# Altium PCB Cross-board_V2.PcbDoc
Units mm, origin at the board's own origin, x right, y up, seen from the top; angles counter-clockwise.
Board outline 140 x 180 mm, 2 copper layers (Top Layer, Bottom Layer); 164 components, 168 nets, 527 pads, 0 vias.
Unrouted connection lines stored in the file: 332.
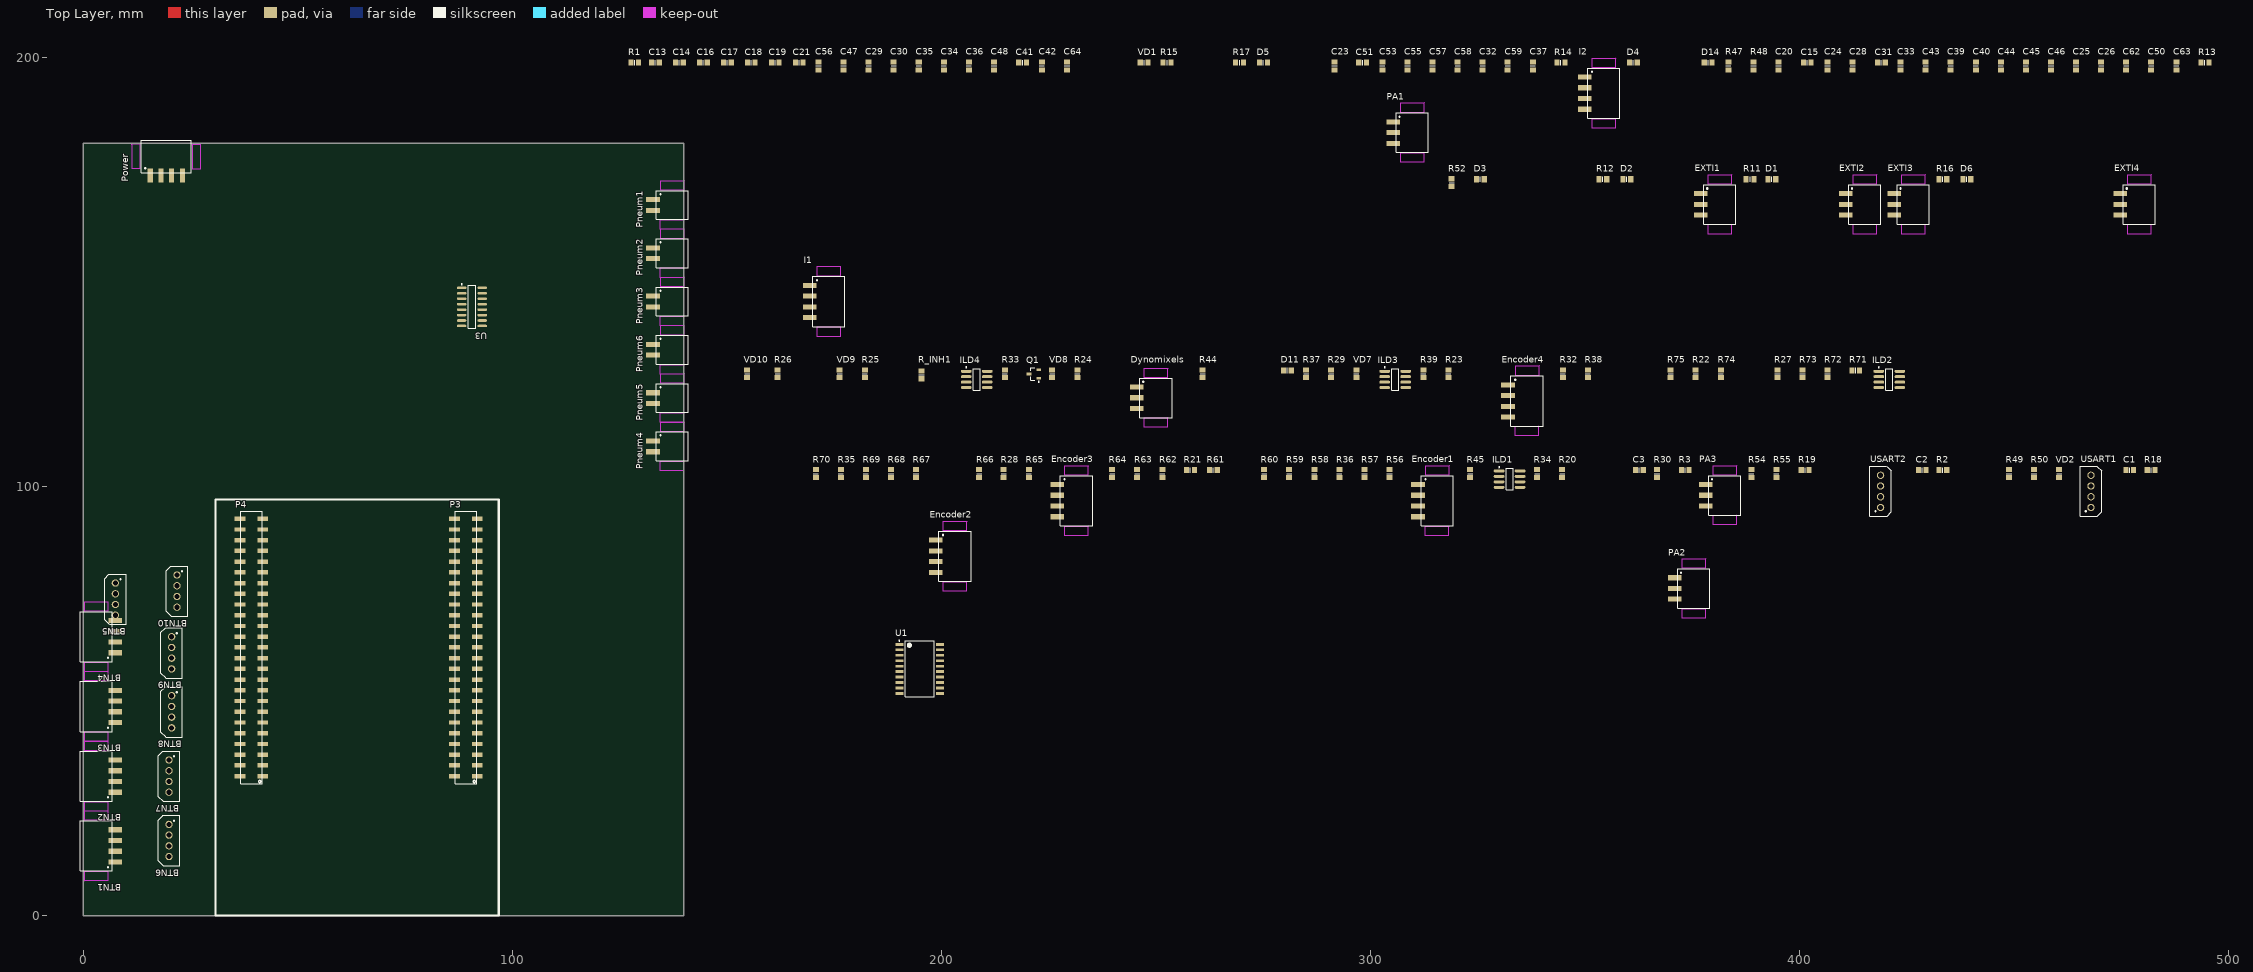
[diagram p0: Top Layer view]
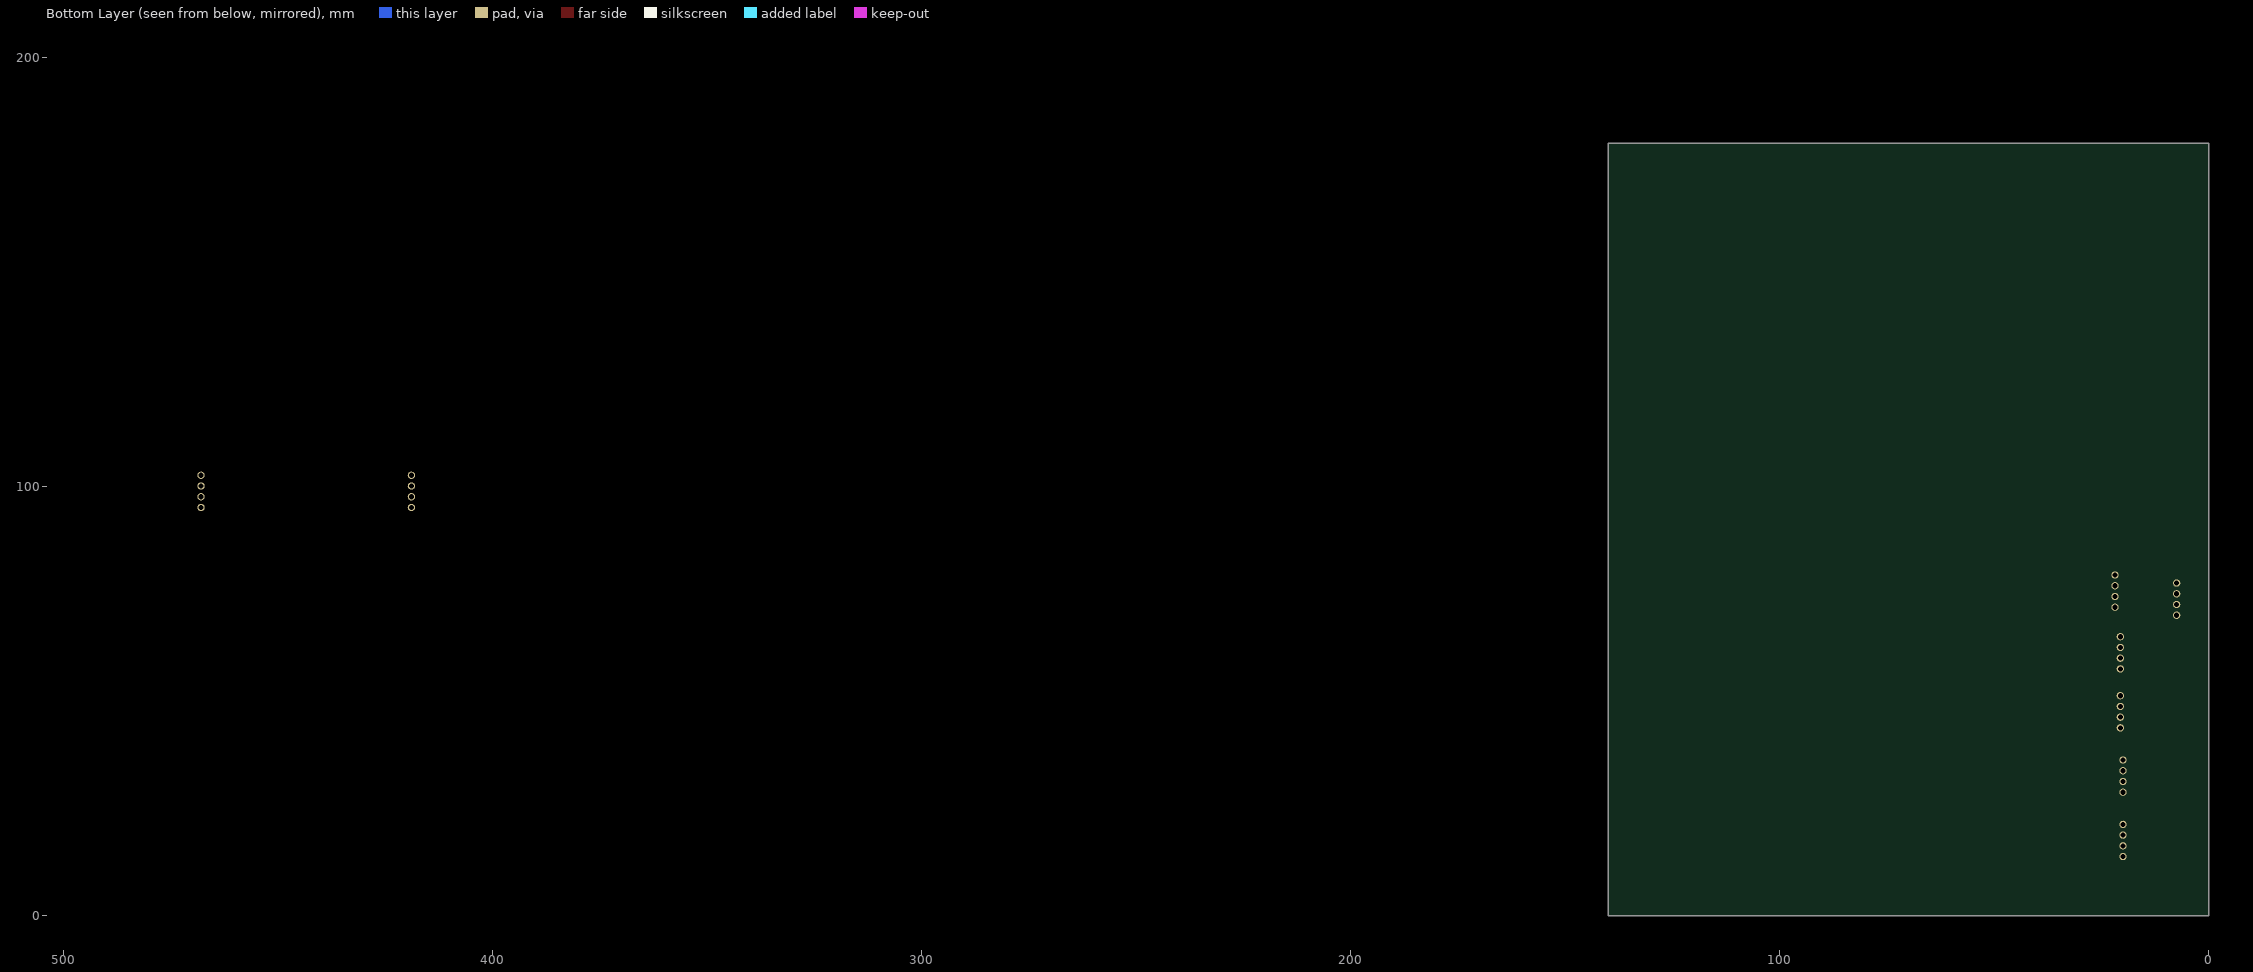
[diagram p1: Bottom Layer view, seen from below]

## Layer stack, top to bottom
Top Solder: solder mask 0.0102, Solder Resist, Dk 3.5
Top Layer: signal copper 0.0356
Dielectric 1: dielectric 0.32, FR-4, Dk 4.8
Bottom Layer: signal copper 0.0356
Bottom Solder: solder mask 0.0102, Solder Resist, Dk 3.5

## Board outline
0,0 140,0 140,180 0,180

## Design rules (kind name [scope] priority, off if disabled: settings)
Clearance [All] p1: gap=0.254
ComponentClearance [All] p1 off: gap=0.254 collisioncheckmode=3 verticalgap=0.254 showdistances=FALSE
PolygonConnect [All] p1: connectstyle=Relief reliefconductorwidth=0.254 reliefentries=4 polygonreliefangle="90 Angle" airgapwidth=0.254
RoutingVias [All] p1: holewidth=0.711 width=1.27 viastyle="Through Hole" minholewidth=0.711 minwidth=1.27 maxholewidth=0.711 maxwidth=1.27
SolderMaskExpansion [All] p1: expansion=0.102
Width [All] p1: maxlimit=0.254 minlimit=0.254 preferedwidth=0.254
29 further rules are at their usual default settings.

## Components (designator, comment, footprint, x,y, rotation, side; value= is the part's Value field where it differs from the comment)
BTN1 "Header3.5mmX4way" "CAT5 2.5x4_smd" 7.5,12.5 r270 top
BTN2 "Header3.5mmX4way" "CAT5 2.5x4_smd" 7.5,28.75 r270 top
BTN3 "Header3.5mmX4way" "CAT5 2.5x4_smd" 7.5,45 r270 top
BTN4 "Header3.5mmX4way" "CAT5 2.5x4_smd" 7.5,61.25 r270 top
BTN5 "Header3.5mmX4way" "CAT5 2.5x4_THR" 7.5,77.5 r270 top
BTN6 "Header3.5mmX4way" "CAT5 2.5x4_THR" 20,21.25 r270 top
BTN7 "Header3.5mmX4way" "CAT5 2.5x4_THR" 20,36.25 r270 top
BTN8 "Header3.5mmX4way" "CAT5 2.5x4_THR" 20.625,51.25 r270 top
BTN9 "Header3.5mmX4way" "CAT5 2.5x4_THR" 20.625,65 r270 top
BTN10 "Header3.5mmX4way" "CAT5 2.5x4_THR" 21.875,79.375 r270 top
C1 "Cap" 6-0805_N 477.901,103.759 r0 top
C2 "Cap" 6-0805_N 429.514,103.759 r0 top
C3 "Cap" 6-0805_N 363.601,103.759 r0 top
C13 "Cap" 6-0805_N 134.239,198.755 r0 top
C14 "Cap" 6-0805_N 139.827,198.755 r0 top
C15 "Cap" 6-0805_n 402.717,198.755 r0 top
C16 "Cap" 6-0805_N 145.415,198.755 r0 top
C17 "Cap" 6-0805_N 151.003,198.755 r0 top
C18 "Cap" 6-0805_N 156.591,198.755 r0 top
C19 "Cap" 6-0805_N 162.179,198.755 r0 top
C20 "Cap" 6-0805_n 395.224,198.882 r90 top
C21 "Cap" 6-0805_n 167.767,198.755 r0 top
C23 "Cap" 6-0805_n 291.719,198.882 r90 top
C24 "Cap" 6-0805_n 406.654,198.882 r90 top
C25 "Cap" 6-0805_n 464.566,198.882 r90 top
C26 "Cap" 6-0805_n 470.408,198.882 r90 top
C28 "Cap" 6-0805_n 412.496,198.882 r90 top
C29 "Cap" 6-0805_N 183.134,198.882 r90 top
C30 "Cap" 6-0805_n 188.976,198.882 r90 top
C31 "Cap" 6-0805_n 419.989,198.755 r0 top
C32 "Cap" 6-0805_N 326.263,198.882 r90 top
C33 "Cap" 6-0805_n 423.672,198.882 r90 top
C34 "Cap" 6-0805_n 200.66,198.882 r90 top
C35 "Cap" 6-0805_n 194.818,198.882 r90 top
C36 "Cap" 6-0805_N 206.502,198.882 r90 top
C37 "Cap" 6-0805_n 337.947,198.882 r90 top
C39 "Cap" 6-0805_n 435.356,198.882 r90 top
C40 "Cap" 6-0805_n 441.198,198.882 r90 top
C41 "Cap" 6-0805_N 219.837,198.755 r0 top
C42 "Cap" 6-0805_N 223.52,198.882 r90 top
C43 "Cap" 6-0805_n 429.514,198.882 r90 top
C44 "Cap" 6-0805_n 447.04,198.882 r90 top
C45 "Cap" 6-0805_n 452.882,198.882 r90 top
C46 "Cap" 6-0805_n 458.724,198.882 r90 top
C47 "Cap" 6-0805_n 177.292,198.882 r90 top
C48 "Cap" 6-0805_N 212.344,198.882 r90 top
C50 "Cap" 6-0805_N 482.092,198.882 r90 top
C51 "Cap" 6-0805_n 299.085,198.755 r0 top
C53 "Cap" 6-0805_n 302.895,198.882 r90 top
C55 "Cap" 6-0805_n 308.737,198.882 r90 top
C56 "Cap" 6-0805_n 171.45,198.882 r90 top
C57 "Cap" 6-0805_n 314.579,198.882 r90 top
C58 "Cap" 6-0805_n 320.421,198.882 r90 top
C59 "Cap" 6-0805_n 332.105,198.882 r90 top
C62 "Cap" 6-0805_N 476.25,198.882 r90 top
C63 "Cap" 6-0805_N 487.934,198.882 r90 top
C64 "Cap" 6-0805_N 229.362,198.882 r90 top
D1 "SMD LED" 6-0805_N 394.462,171.577 r0 top
D2 "SMD LED" 6-0805_N 360.68,171.577 r0 top
D3 "SMD LED" 6-0805_N 326.517,171.577 r0 top
D4 "SMD LED" 6-0805_N 362.204,198.755 r0 top
D5 "SMD LED" 6-0805_N 275.971,198.755 r0 top
D6 "SMD LED" 6-0805_N 439.928,171.577 r0 top
D11 "LED0" 6-0805_N 281.559,127 r0 top
D14 "LED0" 6-0805_N 379.603,198.755 r0 top
Dynomixels "Header 3" "CAT5 2.5x3SMD" 246.507,123.19 r90 top
Encoder1 "Header3.5mmX4way" "CAT5 2.5x4_smd" 311.15,100.457 r90 top
Encoder2 "Header3.5mmX4way" "CAT5 2.5x4_smd" 198.75,87.5 r90 top
Encoder3 "Header3.5mmX4way" "CAT5 2.5x4_smd" 227.076,100.457 r90 top
Encoder4 "Header3.5mmX4way" "CAT5 2.5x4_smd" 332.105,123.698 r90 top
EXTI1 "Header 3" "CAT5 2.5x3SMD" 377.952,168.275 r90 top
EXTI2 "Header 3" "CAT5 2.5x3SMD" 411.734,168.275 r90 top
EXTI3 "Header 3" "CAT5 2.5x3SMD" 423.037,168.275 r90 top
EXTI4 "Header 3" "CAT5 2.5x3SMD" 475.742,168.275 r90 top
I1 "Header 4" "CAT5 2.5x4_smd" 169.375,146.875 r90 top
I2 "Header 4" "CAT5 2.5x4_smd" 350.012,195.453 r90 top
ILD1 "ILD207" SO8_M 332.486,101.727 r0 top
ILD2 "ILD207" SO8_M 421.005,124.968 r0 top
ILD3 "ILD207" SO8_M 305.816,124.968 r0 top
ILD4 "ILD207" SO8_M 208.28,124.968 r0 top
P3 "Header 25X2" "25x2pin connector smd - duplicate" 91.875,32.5 r90 top
P4 "Header 25X2" "25x2pin connector smd - duplicate" 41.875,32.5 r90 top
PA1 "Аналоговый вход 1" "CAT5 2.5x3SMD" 306.25,185 r90 top
PA2 "Аналоговый вход 2" "CAT5 2.5x3SMD" 371.875,78.75 r90 top
PA3 "Аналоговый вход 3" "CAT5 2.5x3SMD" 379.095,100.457 r90 top
Pneum1 "Header_vetrical_3.5x2" "cat5 2.5x 2p SMD" 133.75,166.875 r90 top
Pneum2 "Header_vetrical_3.5x2" "cat5 2.5x 2p SMD" 133.75,155.625 r90 top
Pneum3 "Header_vetrical_3.5x2" "cat5 2.5x 2p SMD" 133.75,144.375 r90 top
Pneum4 "Header_vetrical_3.5x2" "cat5 2.5x 2p SMD" 133.75,110.625 r90 top
Pneum5 "Header_vetrical_3.5x2" "cat5 2.5x 2p SMD" 133.75,121.875 r90 top
Pneum6 "Header_vetrical_3.5x2" "cat5 2.5x 2p SMD" 133.75,133.125 r90 top
Power "Header3.5mmX4way" "CAT5 2.5x4_smd" 15.625,172.5 r180 top
Q1 "IRLML5103" SOT-23_N 221.615,126.238 r0 top
R1 "Res3" 6-0805_N 129.413,198.755 r0 top
R2 "Res3" 6-0805_N 434.34,103.759 r0 top
R3 "Res3" 6-0805_N 374.269,103.759 r0 top
R11 "Res2" 6-0805_N 389.382,171.577 r0 top
R12 "Res2" 6-0805_N 355.092,171.577 r0 top
R13 "Res2" 6-0805_N 495.427,198.755 r0 top
R14 "Res2" 6-0805_N 345.313,198.755 r0 top
R15 "Res2" 6-0805_N 253.492,198.755 r0 top
R16 "Res2" 6-0805_N 434.34,171.577 r0 top
R17 "Res2" 6-0805_N 270.383,198.755 r0 top
R18 "Res2" 6-0805_N 482.854,103.759 r0 top
R19 "Res2" 6-0805_N 402.209,103.759 r0 top
R20 "Res2" 6-0805_N 344.805,103.886 r90 top
R21 "Res2" 6-0805_N 258.953,103.759 r0 top
R22 "Res2" 6-0805_N 375.92,127.127 r90 top
R23 "Res2" 6-0805_N 318.262,127.127 r90 top
R24 "Res2" 6-0805_N 231.775,127.127 r90 top
R25 "Res2" 6-0805_N 182.245,127.127 r90 top
R26 "Res2" 6-0805_N 161.925,127.127 r90 top
R27 "Res2" 6-0805_N 394.97,127.127 r90 top
R28 "Res2" 6-0805_N 214.63,103.886 r90 top
R29 "Res3" 6-0805_N 290.957,127.127 r90 top
R30 "Res3" 6-0805_N 366.903,103.886 r90 top
R32 "Res3" 6-0805_N 344.932,127.127 r90 top
R33 "Res3" 6-0805_N 214.884,127.127 r90 top
R34 "Res3" 6-0805_N 338.963,103.886 r90 top
R35 "Res3" 6-0805_N 176.657,103.886 r90 top
R36 "Res3" 6-0805_N 292.862,103.886 r90 top
R37 "Res3" 6-0805_N 285.115,127.127 r90 top
R38 "Res3" 6-0805_N 350.774,127.127 r90 top
R39 "Res3" 6-0805_N 312.42,127.127 r90 top
R44 "Res2" 6-0805_N 260.985,127.127 r90 top
R45 "Res2" 6-0805_N 323.342,103.886 r90 top
R47 "Res3" 6-0805_N 383.54,198.882 r90 top
R48 "Res3" 6-0805_N 389.382,198.882 r90 top
R49 "Res2" 6-0805_N 448.945,103.886 r90 top
R50 "Res2" 6-0805_N 454.787,103.886 r90 top
R52 "Res2" 6-0805_N 319.024,171.704 r90 top
R54 "Res2" 6-0805_N 388.874,103.886 r90 top
R55 "Res2" 6-0805_N 394.716,103.886 r90 top
R56 "Res2" 6-0805_N 304.546,103.886 r90 top
R57 "Res2" 6-0805_N 298.704,103.886 r90 top
R58 "Res2" 6-0805_N 287.02,103.886 r90 top
R59 "Res2" 6-0805_N 281.178,103.886 r90 top
R60 "Res2" 6-0805_N 275.336,103.886 r90 top
R61 "Res2" 6-0805_N 264.287,103.759 r0 top
R62 "Res2" 6-0805_N 251.587,103.886 r90 top
R63 "Res2" 6-0805_N 245.745,103.886 r90 top
R64 "Res2" 6-0805_N 239.903,103.886 r90 top
R65 "Res2" 6-0805_N 220.472,103.886 r90 top
R66 "Res2" 6-0805_N 208.915,103.886 r90 top
R67 "Res2" 6-0805_N 194.183,103.886 r90 top
R68 "Res2" 6-0805_N 188.341,103.886 r90 top
R69 "Res2" 6-0805_N 182.499,103.886 r90 top
R70 "Res2" 6-0805_N 170.815,103.886 r90 top
R71 "Res2" 6-0805_N 414.02,127 r0 top
R72 "Res2" 6-0805_N 406.654,127.127 r90 top
R73 "Res2" 6-0805_N 400.812,127.127 r90 top
R74 "Res2" 6-0805_N 381.762,127.127 r90 top
R75 "Res2" 6-0805_N 370.078,127.127 r90 top
R_INH1 "Res3" 6-0805_N 195.453,126.873 r90 top
U1 "SN74241" "SOIC127 (sn74241)" 195,57.5 r0 top
U3 "ULN2003D" SO16_N 90.625,141.875 r180 top
USART1 "Header 4" "CAT5 2.5x4_THR" 467.995,95.123 r90 top
USART2 "Header 4" "CAT5 2.5x4_THR" 418.973,95.123 r90 top
VD1 "Bipolar LED" 6-0805_N 248.158,198.755 r0 top
VD2 "Bipolar LED" 6-0805_N 460.629,103.886 r90 top
VD7 "Bipolar LED" 6-0805_N 296.799,127.127 r90 top
VD8 "Bipolar LED" 6-0805_N 225.933,127.127 r90 top
VD9 "Bipolar LED" 6-0805_N 176.403,127.127 r90 top
VD10 "Bipolar LED" 6-0805_N 154.813,127.127 r90 top

## Footprints (in the part's own frame and the unit in brackets; to place one, negate y for a bottom-side part, rotate by r counter-clockwise, add the part's x,y. Pads: shape width x height; smd on the part's side, far side on the other; paste and mask are expansions set on the pad)
6-0805_N [mm]
  rect 1.2x1.4 smd: 1(0.05,0.05) 2(-1.75,0.05)
  silkscreen extent -0.85,-0.55 -0.85,0.65
6-0805_n [mm]
  rect 1.2x1.4 smd: 1(0.05,0.05) 2(-1.75,0.05)
  silkscreen extent -0.85,-0.55 -0.85,0.65
"25x2pin connector smd - duplicate" [mm]
  rect 1.02x2.5 smd: 1(0,0) 2(0,5.3) 3(2.5,0) 4(2.5,5.3) 5(5,0) 6(5,5.3) 7(7.5,0) 8(7.5,5.3) 9(10,0) 10(10,5.3) 11(12.5,0) 12(12.5,5.3) 13(15,0) 14(15,5.3) 15(17.5,0) 16(17.5,5.3) 17(20,0) 18(20,5.3) 19(22.5,0) 20(22.5,5.3) 21(25,0) 22(25,5.3) 23(27.5,0) 24(27.5,5.3) 25(30,0) 26(30,5.3) 27(32.5,0) 28(32.5,5.3) 29(35,0) 30(35,5.3) 31(37.5,0) 32(37.5,5.3) 33(40,0) 34(40,5.3) 35(42.5,0) 36(42.5,5.3) 37(45,0) 38(45,5.3) 39(47.5,0) 40(47.5,5.3) 41(50,0) 42(50,5.3) 43(52.5,0) 44(52.5,5.3) 45(55,0) 46(55,5.3) 47(57.5,0) 48(57.5,5.3) 49(60,0) 50(60,5.3)
  silkscreen extent -1.75,0.15 61.75,5.15
"CAT5 2.5x3SMD" [mm] "3pads"
  rect 1.2x3.2 smd: 1(0,0.9) 2(-2.5,0.9) 3(-5,0.9)
  Top Layer keep-out region: 2.3,-6.35 4.4,-6.35 4.3,-6.25 4.3,-0.75 2.3,-0.75
  Top Layer keep-out region: -9.3,-6.3 -7.2,-6.3 -7.3,-6.2 -7.3,-0.7 -9.3,-0.7
  silkscreen extent -7.1,-7.3 2.1,0.2
"CAT5 2.5x4_smd" [mm] "4pad"
  rect 1.2x3.2 smd: 1(0,0) 2(-2.5,0) 3(-5,0) 4(-7.5,0)
  Top Layer keep-out region: -11.8,-7.2 -9.7,-7.2 -9.8,-7.1 -9.8,-1.6 -11.8,-1.6
  Top Layer keep-out region: 2.3,-7.25 4.4,-7.25 4.3,-7.15 4.3,-1.65 2.3,-1.65
  silkscreen extent -9.6,-8.2 2.1,-0.7
"CAT5 2.5x4_THR" [mm] "4 pins"
  round 1.7 hole 1.2: 1(0,0) 2(2.5,0) 3(5,0) 4(7.5,0)
  silkscreen extent -2.1,-2.5 9.65,2.5
"cat5 2.5x 2p SMD" [mm] "2pads"
  rect 1.2x3.2 smd: 1(0,0.9) 2(-2.5,0.9)
  Top Layer keep-out region: 2.3,-6.35 4.4,-6.35 4.3,-6.25 4.3,-0.75 2.3,-0.75
  Top Layer keep-out region: -6.8,-6.3 -4.7,-6.3 -4.8,-6.2 -4.8,-0.7 -6.8,-0.7
  silkscreen extent -4.6,-7.3 2.1,0.2
SO8_M [mm] "SOIC, 8-Leads, Body 4.9x3.9mm, Pitch 1.27mm, IPC Low Density"
  oval 2.5x0.7 smd: 1(-2.45,1.905) 2(-2.45,0.635) 3(-2.45,-0.635) 4(-2.45,-1.905) 5(2.45,-1.905) 6(2.45,-0.635) 7(2.45,0.635) 8(2.45,1.905)
  silkscreen extent -2.57,-2.5 0.8,2.93, body extent -2,-2.5 2,2.5, height 1.75
SO16_N [mm] "16-Pin Small Outline Integrated Circuit 1.27 mm Pitch, IPC Medium Density"
  oval 2.2x0.6 smd: 1(2.4,-4.445) 2(2.4,-3.175) 3(2.4,-1.905) 4(2.4,-0.635) 5(2.4,0.635) 6(2.4,1.905) 7(2.4,3.175) 8(2.4,4.445) 9(-2.4,4.445) 10(-2.4,3.175) 11(-2.4,1.905) 12(-2.4,0.635) 13(-2.4,-0.635) 14(-2.4,-1.905) 15(-2.4,-3.175) 16(-2.4,-4.445)
  silkscreen extent -0.9,-5.42 2.52,5, body extent -1.95,-4.95 1.95,4.95, height 1.75
"SOIC127 (sn74241)" [mm] "SOIC, 20-Leads, Body 12,80x7,50mm, Pitch 1,27mm, IPC Medium Density"
  rect 1.9x0.65 smd: 1(-4.75,5.715) 2(-4.75,4.445) 3(-4.75,3.175) 4(-4.75,1.905) 5(-4.75,0.635) 6(-4.75,-0.635) 7(-4.75,-1.905) 8(-4.75,-3.175) 9(-4.75,-4.445) 10(-4.75,-5.715) 11(4.75,-5.715) 12(4.75,-4.445) 13(4.75,-3.175) 14(4.75,-1.905) 15(4.75,-0.635) 16(4.75,0.635) 17(4.75,1.905) 18(4.75,3.175) 19(4.75,4.445) 20(4.75,5.715)
  silkscreen extent -4.87,-6.5 3.4,6.71, body extent -3.8,-6.5 3.8,6.5, height 2.65
SOT-23_N [mm] "SOT23, 3-Leads, Body 2.9x1.3mm, Pitch 0.95mm, Lead Span 2.3mm, IPC Medium Density"
  rect 1.15x0.6 smd: 1(1.125,-0.95) 2(1.125,0.95) 3(-1.125,0)
  silkscreen extent -0.7,-1.92 1.25,1.5, body extent -0.7,-1.5 0.7,1.5, height 1.11

## Part data
BTN1 BTN2 BTN3 BTN4 BTN5 BTN6 BTN7 BTN8 BTN9 BTN10 Encoder1 Encoder2 Encoder3 Encoder4 Pneum1 Pneum2 Pneum3 Pneum4 Pneum5 Pneum6 Power: "screw_connector"
C1 C2 C3 C13 C14 C15 C16 C17 C18 C19 C20 C21 C23 C24 C25 C26 C28 C29 C30 C31 C32 C33 C34 C35 C36 C37 C39 C40 C41 C42 C43 C44 C45 C46 C47 C48 C50 C51 C53 C55 C56 C57 C58 C59 C62 C63 C64: "Capacitor"
D1 D2 D3 D4 D5 D6: library part LED0, "Typical INFRARED GaAs LED"
D11 D14: "Typical INFRARED GaAs LED"
Dynomixels EXTI1 EXTI2 EXTI3 EXTI4: "Header, 3-Pin"
I1 I2 USART1 USART2: "Header, 4-Pin"
P3 P4: "Header, 25-Pin, Dual row"
PA1 PA2 PA3: library part "Header 3", "Header, 3-Pin"
Q1: "HEXFET Power MOSFET"
R1 R2 R3 R11 R12 R13 R14 R15 R16 R17 R18 R19 R20 R21 R22 R23 R24 R25 R26 R27 R28 R29 R30 R32 R33 R34 R35 R36 R37 R38 R39 R44 R45 R47 R48 R49 R50 R52 R54 R55 R56 R57 R58 R59 R60 R61 R62 R63 R64 R65 R66 R67 R68 R69 R70 R71 R72 R73 R74 R75 R_INH1: "Resistor"
U3: "Seven Darlington Array"

## Nets (pads, with @x,y where several pads share a name; then routed paths per layer and width w, separated by ;. In a path a pad name is that pad's centre, name@x,y a point inside that pad or via, vN(x,y) a via of type N, cw(c..) or ccw(c..) an arc to the next point about the centre after c; other vN are vias at no path point)
+3.3V: C13.2 C14.2 C16.2 C17.2 C18.2 C19.2 C21.2 C29.2 C30.2 C34.2 C35.2 C36.2 C41.2 C42.2 C47.2 C48.2 C56.2 C64.2 Encoder1.4 Encoder2.4 Encoder3.4 Encoder4.4 EXTI1.3 EXTI2.3 EXTI3.3 EXTI4.3 I1.4 I2.4 Power.2 R47.1 R48.1
+5V: C15.2 C20.2 C24.2 C25.2 C26.2 C28.2 C31.2 C33.2 C39.2 C40.2 C43.2 C44.2 C45.2 C46.2 C50.2 C62.2 C63.2 ILD1.6 ILD1.8 ILD2.6 ILD2.8 ILD3.6 ILD3.8 ILD4.8 PA1.3 PA2.3 PA3.3 Power.3 Q1.2 U1.20
+5V_BOARD: P4.3 P4.4 R52.1
+12V: C23.2 C32.2 C37.2 C51.2 C53.2 C55.2 C57.2 C58.2 C59.2 Dynomixels.2 Pneum1.1 Pneum2.1 Pneum3.1 Pneum4.1 Pneum5.1 Pneum6.1 Power.4 R11.1 R12.1 R13.1 R14.1 R15.1 R16.1 R49.2 R50.2 U3.9 USART1.4
GND: BTN1.1 BTN2.1 BTN3.1 BTN4.1 BTN5.1 BTN6.1 BTN7.1 BTN8.1 BTN9.1 BTN10.1 C1.2 C2.2 C3.2 C13.1 C14.1 C15.1 C16.1 C17.1 C18.1 C19.1 C20.1 C21.1 C23.1 C24.1 C25.1 C26.1 C28.1 C29.1 C30.1 C31.1 C32.1 C33.1 C34.1 C35.1 C36.1 C37.1 C39.1 C40.1 C41.1 C42.1 C43.1 C44.1 C45.1 C46.1 C47.1 C48.1 C50.1 C51.1 C53.1 C55.1 C56.1 C57.1 C58.1 C59.1 C62.1 C63.1 C64.1 D11.2 D14.2 Dynomixels.1 Encoder1.1 Encoder2.1 Encoder3.1 Encoder4.1 EXTI1.1 EXTI2.1 EXTI3.1 EXTI4.1 I1.1 I2.1 ILD1.2 ILD1.4 ILD2.2 ILD2.4 ILD3.2 ILD3.4 ILD4.2 P3.1 P3.2 P3.5 P3.23 P3.49 P3.50 P4.1 P4.2 P4.49 P4.50 PA1.1 PA2.1 PA3.1 Power.1 R34.2 R35.2 R36.2 R37.2 R38.2 R39.2 R_INH1.2 U1.10 U3.7 U3.8 USART1.1 USART2.1
IN1: ILD3.7 R39.1 U3.1
IN2: ILD3.5 R37.1 U3.2
IN3: ILD2.7 R35.1 U3.3
IN4: ILD2.5 R38.1 U3.4
IN5: ILD1.7 R34.1 U3.5
IN6: ILD1.5 R36.1 U3.6
INH: Q1.3 R44.1
INHIBIT: BTN1.3 BTN2.3 BTN3.3 BTN4.3 BTN5.3 BTN6.3 BTN7.3 BTN8.3 BTN9.3 BTN10.3
NetD1_1: D1.1 R11.2
NetD2_1: D2.1 R12.2
NetD3_1: D3.1 R13.2
NetD4_1: D4.1 R14.2
NetD5_1: D5.1 R15.2
NetD6_1: D6.1 R16.2
NetD11_1: D11.1 R44.2
NetD14_1: D14.1 R52.2
NetDynomixels_3: Dynomixels.3 U1.2 U1.3
NetILD1_1: ILD1.1 R30.2
NetILD1_3: ILD1.3 R45.2
NetILD2_1: ILD2.1 R28.2
NetILD2_3: ILD2.3 R27.2
NetILD3_1: ILD3.1 R32.2
NetILD3_3: ILD3.3 R29.2
NetILD4_1: ILD4.1 R33.2
NetILD4_7: ILD4.7 Q1.1 R_INH1.1
NetP7_2: R54.2 R55.2 USART2.4
NetPA1_2: PA1.2 R1.1
NetPA2_2: PA2.2 R2.1
NetPA3_2: PA3.2 R3.1
NetR17_2: R17.2 VD1.1
NetR18_2: R18.2 VD2.1
NetR19_2: R19.2
NetR20_2: R20.2
NetR21_2: R21.2
NetR22_2: R22.2
NetR23_2: R23.2 VD7.1
NetR24_2: R24.2 VD8.1
NetR25_2: R25.2 VD9.1
NetR26_2: R26.2 VD10.1
NetR56_2: R56.2
NetR57_2: R57.2
NetR58_2: R58.2
NetR59_2: R59.2
NetR60_2: R60.2
NetR61_2: R61.2
NetR62_2: R62.2
NetR63_2: R63.2
NetR64_2: R64.2
NetR65_2: R65.2
NetR66_2: R66.2
NetR67_2: R67.2
NetR68_2: R68.2
NetR69_2: R69.2
NetR70_2: R70.2
NetR71_2: R71.2
NetR72_2: R72.2
NetR73_2: R73.2
NetR74_2: R74.2
NetR75_2: R75.2
PA0: Encoder4.3 P3.12
PA1: Encoder4.2 P3.11
PA2: C1.1 P3.14 R1.2
PA3: C2.1 P3.13 R2.2
PA4: C3.1 P3.16 R3.2
PA5: P3.15
PA6: P3.18
PA7: P3.17
PA8: P4.43
PA9: P4.44
PA10: P4.41
PA13: P4.42
PA14: P4.39
PA15: EXTI1.2 P4.40
PB0: P3.22
PB1: P3.21
PB2: P3.24
PB3: P4.28 R33.1
PB4: P4.25 R58.1
PB5: P4.26 R59.1
PB6: P4.23 R55.1 USART2.3
PB7: P4.24 R54.1 USART2.2
PB8: P4.19 R61.1
PB9: P4.20 R60.1
PB10: I1.2 I2.2 P3.34 R47.2
PB11: I1.3 I2.3 P3.35 R48.2
PB12: P3.36 U1.1 U1.19
PB13: P3.37 R73.1
PB14: P3.38 R74.1
PB15: P3.39 R75.1
PC0: P3.8
PC1: P3.7
PC2: P3.10
PC3: P3.9
PC4: P3.20
PC5: P3.19
PC6: Encoder1.3 P4.47
PC7: Encoder1.2 P4.48
PC8: P4.45 R56.1
PC9: P4.46 R57.1
PC10: P4.37 R49.1 U1.17 USART1.2
PC11: P4.38 R50.1 U1.18 USART1.3
PC12: EXTI3.2 P4.35
PC13: P4.12
PC14: P4.9 R68.1
PC15: P4.10 R69.1
PD0: EXTI2.2 P4.36
PD1: P4.33
PD2: EXTI4.2 P4.34
PD3: P4.31
PD4: P4.32
PD5: P4.29
PD6: P4.30
PD7: P4.27
PD8: P3.40 R30.1
PD9: P3.41 R45.1
PD10: P3.42 R28.1
PD11: P3.43 R27.1
PD12: Encoder2.3 P3.44
PD13: Encoder2.2 P3.45
PD14: P3.46 R32.1
PD15: P3.47 R29.1
PE0: P4.17 R62.1
PE1: P4.18 R63.1
PE2: P4.15 R64.1
PE3: P4.16 R65.1
PE4: P4.13
PE5: P4.14 R66.1
PE6: P4.11 R67.1
PE7: P3.25
PE8: P3.26
PE9: Encoder3.3 P3.27
PE10: P3.28 R71.1
PE11: Encoder3.2 P3.29
PE12: P3.30
PE13: P3.31 R70.1
PE14: P3.32 R72.1
PE15: P3.33
PNEUM_1: D6.2 Pneum1.2 U3.16
PNEUM_2: D1.2 Pneum2.2 U3.15
PNEUM_3: D2.2 Pneum3.2 U3.14
PNEUM_4: D3.2 Pneum4.2 U3.13
PNEUM_5: D4.2 Pneum5.2 U3.12
PNEUM_6: D5.2 Pneum6.2 U3.11
PWM1: BTN5.4 R21.1
PWM1DIR: BTN5.2
PWM2: BTN6.4 R22.1
PWM2DIR: BTN6.2
PWM3: BTN7.4 R23.1
PWM3DIR: BTN7.2 VD7.2
PWM4: BTN8.4 R24.1
PWM4DIR: BTN8.2 VD8.2
PWM5: BTN9.4 R25.1
PWM5DIR: BTN9.2 VD9.2
PWM6: BTN10.4 R26.1
PWM6DIR: BTN10.2 VD10.2
WHEEL1DIR: BTN1.2 VD1.2
WHEEL1PWM: BTN1.4 R17.1
WHEEL2DIR: BTN2.2 VD2.2
WHEEL2PWM: BTN2.4 R18.1
WHEEL3DIR: BTN3.2
WHEEL3PWM: BTN3.4 R19.1
WHEEL4DIR: BTN4.2
WHEEL4PWM: BTN4.4 R20.1
pads on no net: ILD4.3 ILD4.4 ILD4.5 ILD4.6 P3.3 P3.4 P3.6 P3.48 P4.5 P4.6 P4.7 P4.8 P4.21 P4.22 U1.4 U1.5 U1.6 U1.7 U1.8 U1.9 U1.11 U1.12 U1.13 U1.14 U1.15 U1.16 U3.10

## Silkscreen, mask and mechanical layers (free items; w line width, h text height)
Top Overlay:
  lines w0.5: 30.875,0 30.875,97 96.875,97 96.875,0 30.875,0
Mechanical 1:
  the board outline again, w0.5